# EAGLE board Syno_Ver1.3 (EAGLE 9.5.2)
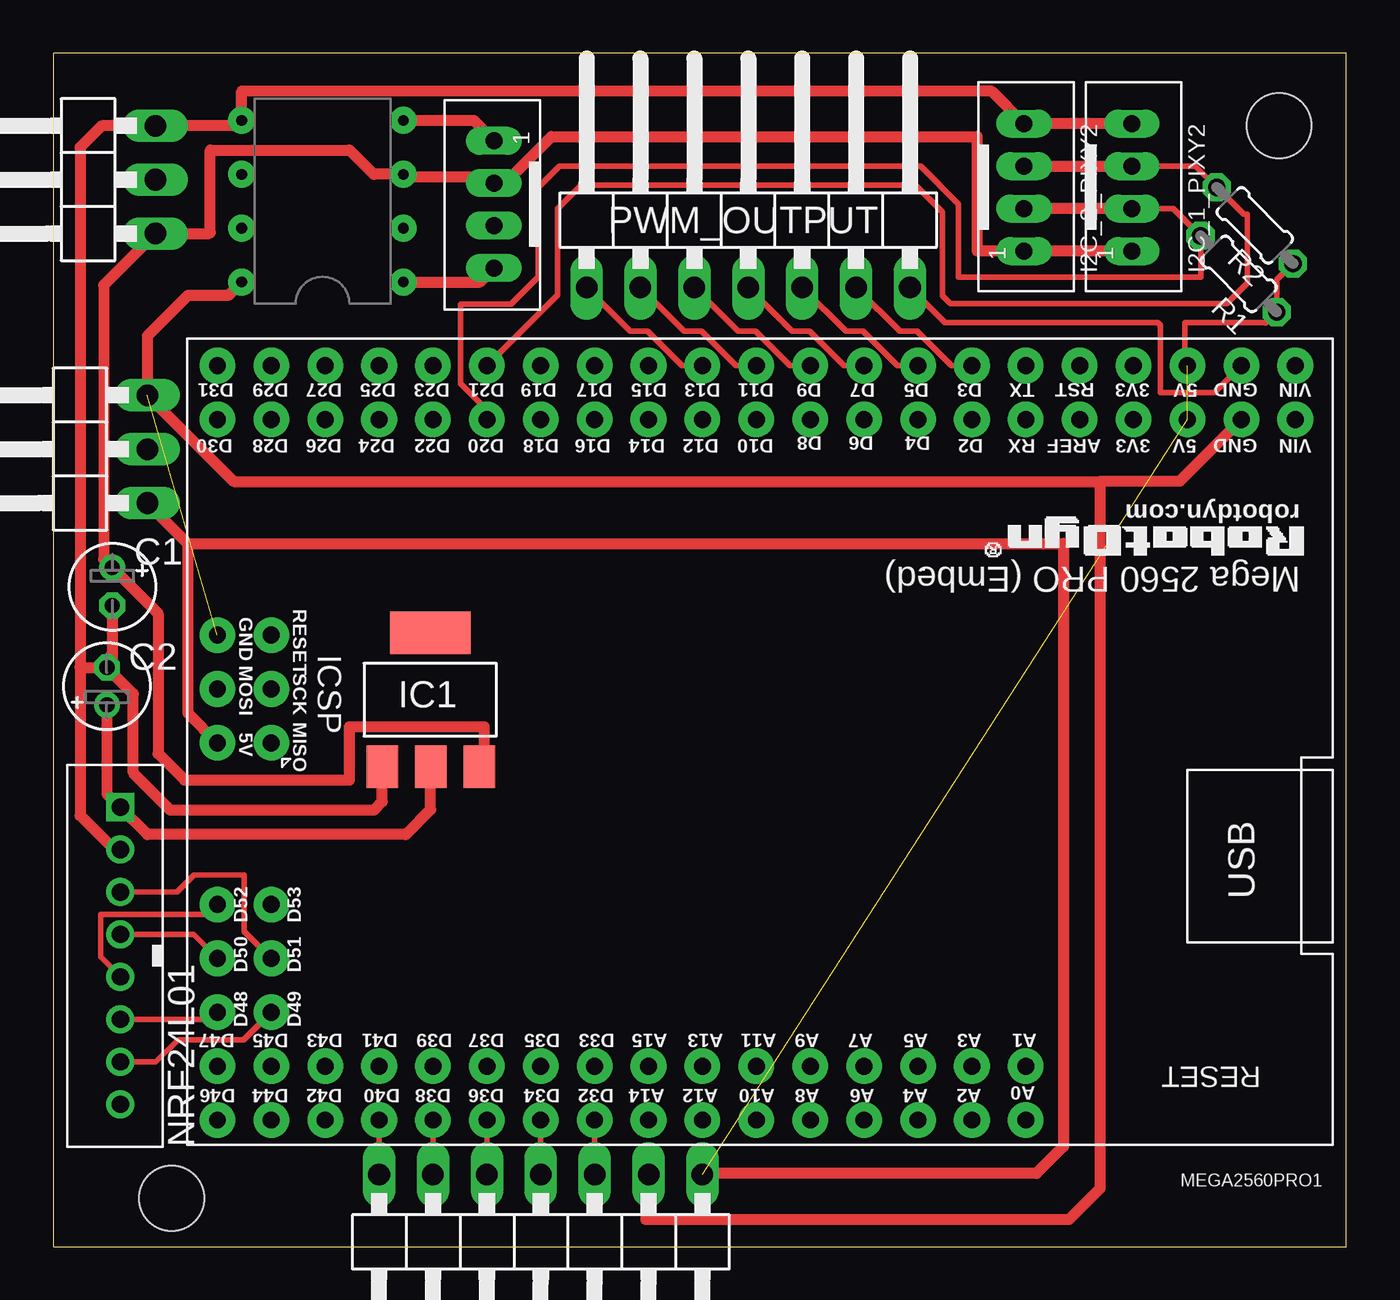
[diagram p0: board, top side]

Size 60.96 x 56.26 mm. Coordinates in mm from the lower left corner, seen from the top.
Outline: 0,56.26 0,0 60.96,0 60.96,56.26 0,56.26
Copper layers (1*16): Top 0.035mm / dielectric 1.5mm / Bottom 0.035mm
Design rules "default": minimum track width 6mil, minimum drill 0.35mm, track to track 6mil, track to pad 6mil, pad to pad 6mil, via to via 6mil, smd to smd 6mil, copper to edge 40mil, drill to drill 6mil, minimum pad ring 10mil, minimum via ring 8mil, stop-mask expansion 4mil, vias tented up to drill 0mil, thermal gap 10mil
Holes 3.05 mm at 57.78,52.83 5.59,2.29

## Footprints (pad centres in the part's own frame; a part is rotated, then mirrored left to right if it is on the bottom)
E1,8-4 = drill 0.711 pad 1.168: + -0.889,0 | drill 0.711 pad 1.168 octagon: - 0.889,0
JST_B4B-PH_HEADER = drill 0.8 long: P1 2.98,0.048; P2 0.98,0.048; P3 -1.02,0.048; P4 -3.02,0.048
SOT223 = smd 1.499 x 2.007: 1 -2.261,-3.15; 2 0.025,-3.15; 3 2.311,-3.15 | smd 3.81 x 2.007: 4 0,3.15
MEGA2560PRO-EMBED = drill 0.8 pad 1.676: 3V3@1 -25.4,-19.05; 3V3@2 -25.4,-16.51; 5V@1 -27.94,-19.05; 5V@2 -27.94,-16.51; 5V@3 17.78,-1.27; A0 -20.32,16.51; A1 -20.32,13.97; A2 -17.78,16.51; A3 -17.78,13.97; A4 -15.24,16.51; A5 -15.24,13.97; A6 -12.7,16.51; A7 -12.7,13.97; A8 -10.16,16.51; A9 -10.16,13.97; A10 -7.62,16.51; A11 -7.62,13.97; A12 -5.08,16.51; A13 -5.08,13.97; A14 -2.54,16.51; A15 -2.54,13.97; AREF -22.86,-16.51; D2 -17.78,-16.51; D3 -17.78,-19.05; D4 -15.24,-16.51; D5 -15.24,-19.05; D6 -12.7,-16.51; D7 -12.7,-19.05; D8 -10.16,-16.51; D9 -10.16,-19.05; D10 -7.62,-16.51; D11 -7.62,-19.05; D12 -5.08,-16.51; D13 -5.08,-19.05; D14 -2.54,-16.51; D15 -2.54,-19.05; D16 0,-16.51; D17 0,-19.05; D18 2.54,-16.51; D19 2.54,-19.05; D20 5.08,-16.51; D21 5.08,-19.05; D22 7.62,-16.51; D23 7.62,-19.05; D24 10.16,-16.51; D25 10.16,-19.05; D26 12.7,-16.51; D27 12.7,-19.05; D28 15.24,-16.51; D29 15.24,-19.05; D30 17.78,-16.51; D31 17.78,-19.05; D32 0,16.51; D33 0,13.97; D34 2.54,16.51; D35 2.54,13.97; D36 5.08,16.51; D37 5.08,13.97; D38 7.62,16.51; D39 7.62,13.97; D40 10.16,16.51; D41 10.16,13.97; D42 12.7,16.51; D43 12.7,13.97; D44 15.24,16.51; D45 15.24,13.97; D46 17.78,16.51; D47 17.78,13.97; D48 17.78,11.43; D49 15.24,11.43; D50 17.78,8.89; D51 15.24,8.89; D52 17.78,6.35; D53 15.24,6.35; GND@1 -30.48,-19.05; GND@2 -30.48,-16.51; GND@3 17.78,-6.35; MISO 15.24,-1.27; MOSI 17.78,-3.81; RESET 15.24,-6.35; RST -22.86,-19.05; RX -20.32,-16.51; SCK 15.24,-3.81; TX -20.32,-19.05; VIN@1 -33.02,-19.05; VIN@2 -33.02,-16.51
B8B-PH-K-S = drill 0.813 square: 1 7,0 | drill 0.813: 2 5,0; 3 3,0; 4 1,0; 5 -1,0; 6 -3,0; 7 -5,0; 8 -7,0
1X03/90 = drill 1.016 long: 1 -2.54,-3.81; 2 0,-3.81; 3 2.54,-3.81
1X07/90 = drill 1.016 long: 1 -7.62,-3.81; 2 -5.08,-3.81; 3 -2.54,-3.81; 4 0,-3.81; 5 2.54,-3.81; 6 5.08,-3.81; 7 7.62,-3.81
0204/5 = drill 0.813 octagon: 1 -2.54,0; 2 2.54,0
L9110H = drill 0.5 pad 1.27: GND 7.62,7.62; GND@2 7.62,0; IA 7.62,2.54; IB 7.62,5.08; OA 0,7.62; OB 0,0; VCC 0,5.08; VCC@2 0,2.54

## Placement (x,y rotation side)
C1  10  [E1,8-4]  2.79,31.12 270 top
C2  10  [E1,8-4]  2.54,26.42 90 top
I2C_1_PIXY2  [JST_B4B-PH_HEADER]  50.8,49.91 270 top
I2C_2_PIXY2  [JST_B4B-PH_HEADER]  45.72,49.91 270 top
IC1  REG1117  [SOT223]  17.78,25.78 0 top
MEGA2560PRO1  MEGA2560PRO-EMBED  [MEGA2560PRO-EMBED]  25.53,22.48 180 top
NRF24L01  8PIN  [B8B-PH-K-S]  3.17,13.72 90 top
POWER_MC  [1X03/90]  0.64,37.59 90 top
POWER_SENSOR  [1X03/90]  1.02,50.29 90 top
PWM_OUTPUT  [1X07/90]  32.77,49.02 0 top
R1  1000k  [0204/5]  55.88,45.85 135 top
R2  1000k  [0204/5]  56.64,48.13 135 top
RC_INPUT  [1X07/90]  22.99,-0.41 180 top
SAND_BAG_MOTOR  JST-PH_4-PIN_HEADER  [JST_B4B-PH_HEADER]  20.83,49.15 90 top
U$1  L9110H  [L9110H]  16.51,53.09 180 top

## Library data of the parts
C1 C2 = rcl; SPICEPREFIX: C
I2C_1_PIXY2 I2C_2_PIXY2 SAND_BAG_MOTOR = srg
IC1 = burr-brown; MPN: REG1117; OC_FARNELL: 1097566; OC_NEWARK: 14P6981
MEGA2560PRO1 = robotdyn
NRF24L01 = jst_eph
POWER_MC POWER_SENSOR PWM_OUTPUT RC_INPUT = pinhead
R1 R2 = rcl; SPICEPREFIX: R
U$1 = L9110

## Nets
5V: MEGA2560PRO1.5V@1 MEGA2560PRO1.5V@2 MEGA2560PRO1.5V@3 POWER_MC.1 R1.1 R2.1 RC_INPUT.1
5V_S: C1.+ I2C_1_PIXY2.P1 I2C_2_PIXY2.P1 IC1.3 POWER_SENSOR.1 U$1.VCC@2
GND: MEGA2560PRO1.GND@1 MEGA2560PRO1.GND@2 MEGA2560PRO1.GND@3 POWER_MC.3 PWM_OUTPUT.7 RC_INPUT.2 U$1.GND
GND_S: C1.- C2.- I2C_1_PIXY2.P4 I2C_2_PIXY2.P4 IC1.1 NRF24L01.2 POWER_SENSOR.3 U$1.GND@2
N$1: MEGA2560PRO1.D51 NRF24L01.3
N$2: C2.+ IC1.2 NRF24L01.1
N$3: MEGA2560PRO1.D50 NRF24L01.4
N$4: MEGA2560PRO1.D52 NRF24L01.5
N$5: SAND_BAG_MOTOR.P1 U$1.OB
N$6: SAND_BAG_MOTOR.P4 U$1.OA
N$7: MEGA2560PRO1.D13 PWM_OUTPUT.1
N$8: MEGA2560PRO1.D11 PWM_OUTPUT.2
N$9: MEGA2560PRO1.D9 PWM_OUTPUT.3
N$10: MEGA2560PRO1.D7 PWM_OUTPUT.4
N$11: MEGA2560PRO1.D5 PWM_OUTPUT.5
N$12: MEGA2560PRO1.D3 PWM_OUTPUT.6
N$13: MEGA2560PRO1.D32 RC_INPUT.3
N$14: MEGA2560PRO1.D34 RC_INPUT.4
N$15: MEGA2560PRO1.D36 RC_INPUT.5
N$16: MEGA2560PRO1.D38 RC_INPUT.6
N$17: MEGA2560PRO1.D40 RC_INPUT.7
N$18: MEGA2560PRO1.D48 NRF24L01.6
N$19: MEGA2560PRO1.D49 NRF24L01.7
SCL: I2C_1_PIXY2.P3 I2C_2_PIXY2.P3 MEGA2560PRO1.D21 R2.2
SDA: I2C_1_PIXY2.P2 I2C_2_PIXY2.P2 MEGA2560PRO1.D20 R1.2
VCC: U$1.VCC

## Tracks (layer width: path | path; a pad name or v marks a point on that pad's centre or on a via)
5V  (2 unrouted)
  Top 0.254: 57.15,43.52 57.17,43.54 | 57.17,43.54 R1.1 57.68,45.58 R2.1 | MEGA2560PRO1.5V@1 53.34,41.66 53.34,43.56 57.15,43.56 57.17,43.54
  Top 0.508: MEGA2560PRO1.5V@1 53.85,41.53 | POWER_MC.1 6.35,33.15 | MEGA2560PRO1.5V@3 6.35,25.15 6.35,33.15 | 6.35,33.15 47.62,33.15 47.62,4.72 46.35,3.45 30.66,3.45 RC_INPUT.1
5V_S
  Top 0.508: I2C_1_PIXY2.P1 I2C_2_PIXY2.P1 43.56,46.93 43.56,52.32 23.5,52.32 21.59,50.42 16.64,50.42 U$1.VCC@2 15.11,50.55 13.97,51.69 7.42,51.69 7.42,47.8 7.37,47.75 POWER_SENSOR.1 2.39,45.31 2.39,32.41 C1.+ 4.95,29.84 4.95,23.24 6.2,22 13.97,22 13.97,24.51 20.32,24.51 20.32,22.86 IC1.3
GND  (1 unrouted)
  Top 0.254: PWM_OUTPUT.7 42.04,43.56 52.07,43.56 52.2,43.43 52.2,40.26 54.74,40.26 MEGA2560PRO1.GND@1
  Top 0.508: U$1.GND 8.26,44.83 6.35,44.83 4.45,42.93 POWER_MC.3 8.51,36.07 49.34,36.07 | MEGA2560PRO1.GND@2 53.09,36.07 49.34,36.07 | 49.34,36.07 49.34,2.73 47.88,1.27 27.94,1.27 27.94,3.28 RC_INPUT.2
GND_S
  Top 0.508: IC1.1 15.52,20.98 15.11,20.57 5.54,20.57 3.79,22.33 3.79,26.06 C2.- | 1.27,27.3 1.27,51.82 2.29,52.83 POWER_SENSOR.3 8.64,52.83 U$1.GND@2 8.89,54.48 44.22,54.48 I2C_2_PIXY2.P4 I2C_1_PIXY2.P4 | C1.- 2.79,27.56 C2.- | 1.27,27.3 C2.- | 1.27,27.3 1.27,20.32 2.87,18.72 NRF24L01.2
N$1
  Top 0.254: NRF24L01.3 5.84,16.72 6.65,17.53 9.02,17.53 9.02,14.86 MEGA2560PRO1.D51
N$2
  Top 0.508: IC1.2 17.8,20.6 16.64,19.43 4.46,19.43 NRF24L01.1 2.54,21.35 C2.+
N$3
  Top 0.254: NRF24L01.4 6.62,14.72 MEGA2560PRO1.D50
N$4
  Top 0.254: MEGA2560PRO1.D52 7.27,15.66 2.23,15.66 2.23,13.66 NRF24L01.5
N$5
  Top 0.508: U$1.OB 19.82,53.09 SAND_BAG_MOTOR.P1
N$6
  Top 0.508: U$1.OA 20.12,45.47 SAND_BAG_MOTOR.P4
N$7
  Top 0.254: PWM_OUTPUT.1 27.2,43.16 28.02,43.16 29.65,41.53 MEGA2560PRO1.D13
N$8
  Top 0.254: PWM_OUTPUT.2 29.74,43.16 30.56,43.16 32.19,41.53 MEGA2560PRO1.D11
N$9
  Top 0.254: PWM_OUTPUT.3 32.28,43.16 33.1,43.16 34.73,41.53 MEGA2560PRO1.D9
N$10
  Top 0.254: PWM_OUTPUT.4 34.82,43.16 35.64,43.16 37.27,41.53 MEGA2560PRO1.D7
N$11
  Top 0.254: PWM_OUTPUT.5 37.36,43.16 38.18,43.16 39.81,41.53 MEGA2560PRO1.D5
N$12
  Top 0.254: PWM_OUTPUT.6 39.9,43.16 40.72,43.16 42.35,41.53 MEGA2560PRO1.D3
N$13
  Top 0.254: MEGA2560PRO1.D32 RC_INPUT.3
N$14
  Top 0.254: MEGA2560PRO1.D34 RC_INPUT.4
N$15
  Top 0.254: MEGA2560PRO1.D36 RC_INPUT.5
N$16
  Top 0.254: MEGA2560PRO1.D38 RC_INPUT.6
N$17
  Top 0.254: MEGA2560PRO1.D40 RC_INPUT.7
N$18
  Top 0.254: NRF24L01.6 7.41,10.72 MEGA2560PRO1.D48
N$19
  Top 0.254: NRF24L01.7 4.85,8.72 5.89,9.75 8.99,9.75 MEGA2560PRO1.D49
SCL
  Top 0.254: MEGA2560PRO1.D21 23.77,44.86 23.77,48.92 24.89,50.04 40.64,50.04 41.91,48.77 41.91,44.83 42.29,44.45 55.32,44.45 56.29,45.42 56.29,48.66 56.12,48.66 R2.2 53.84,50.93 I2C_1_PIXY2.P3
  Top 0.508: I2C_2_PIXY2.P3 I2C_1_PIXY2.P3
SDA
  Top 0.152: 49.53,48.93 I2C_1_PIXY2.P2
  Top 0.254: MEGA2560PRO1.D20 20.45,39.44 19.2,40.69 19.2,44.42 21.59,44.42 22.86,45.7 22.86,49.91 23.88,50.93 40.89,50.93 42.67,49.15 42.67,45.7 54.09,45.7 R1.2 52.8,48.93 I2C_1_PIXY2.P2
  Top 0.508: 49.53,48.93 I2C_2_PIXY2.P2